# Altium PCB TECLADO-G5-5A.pcbDoc.PcbDoc (part 3 of 4)
Units mil, origin at the board's own origin, x right, y up, seen from the top; angles counter-clockwise.
Board outline 3514 x 3456 mil, 2 copper layers (Top Layer, Bottom Layer); 59 components, 33 nets, 154 pads, 25 vias.
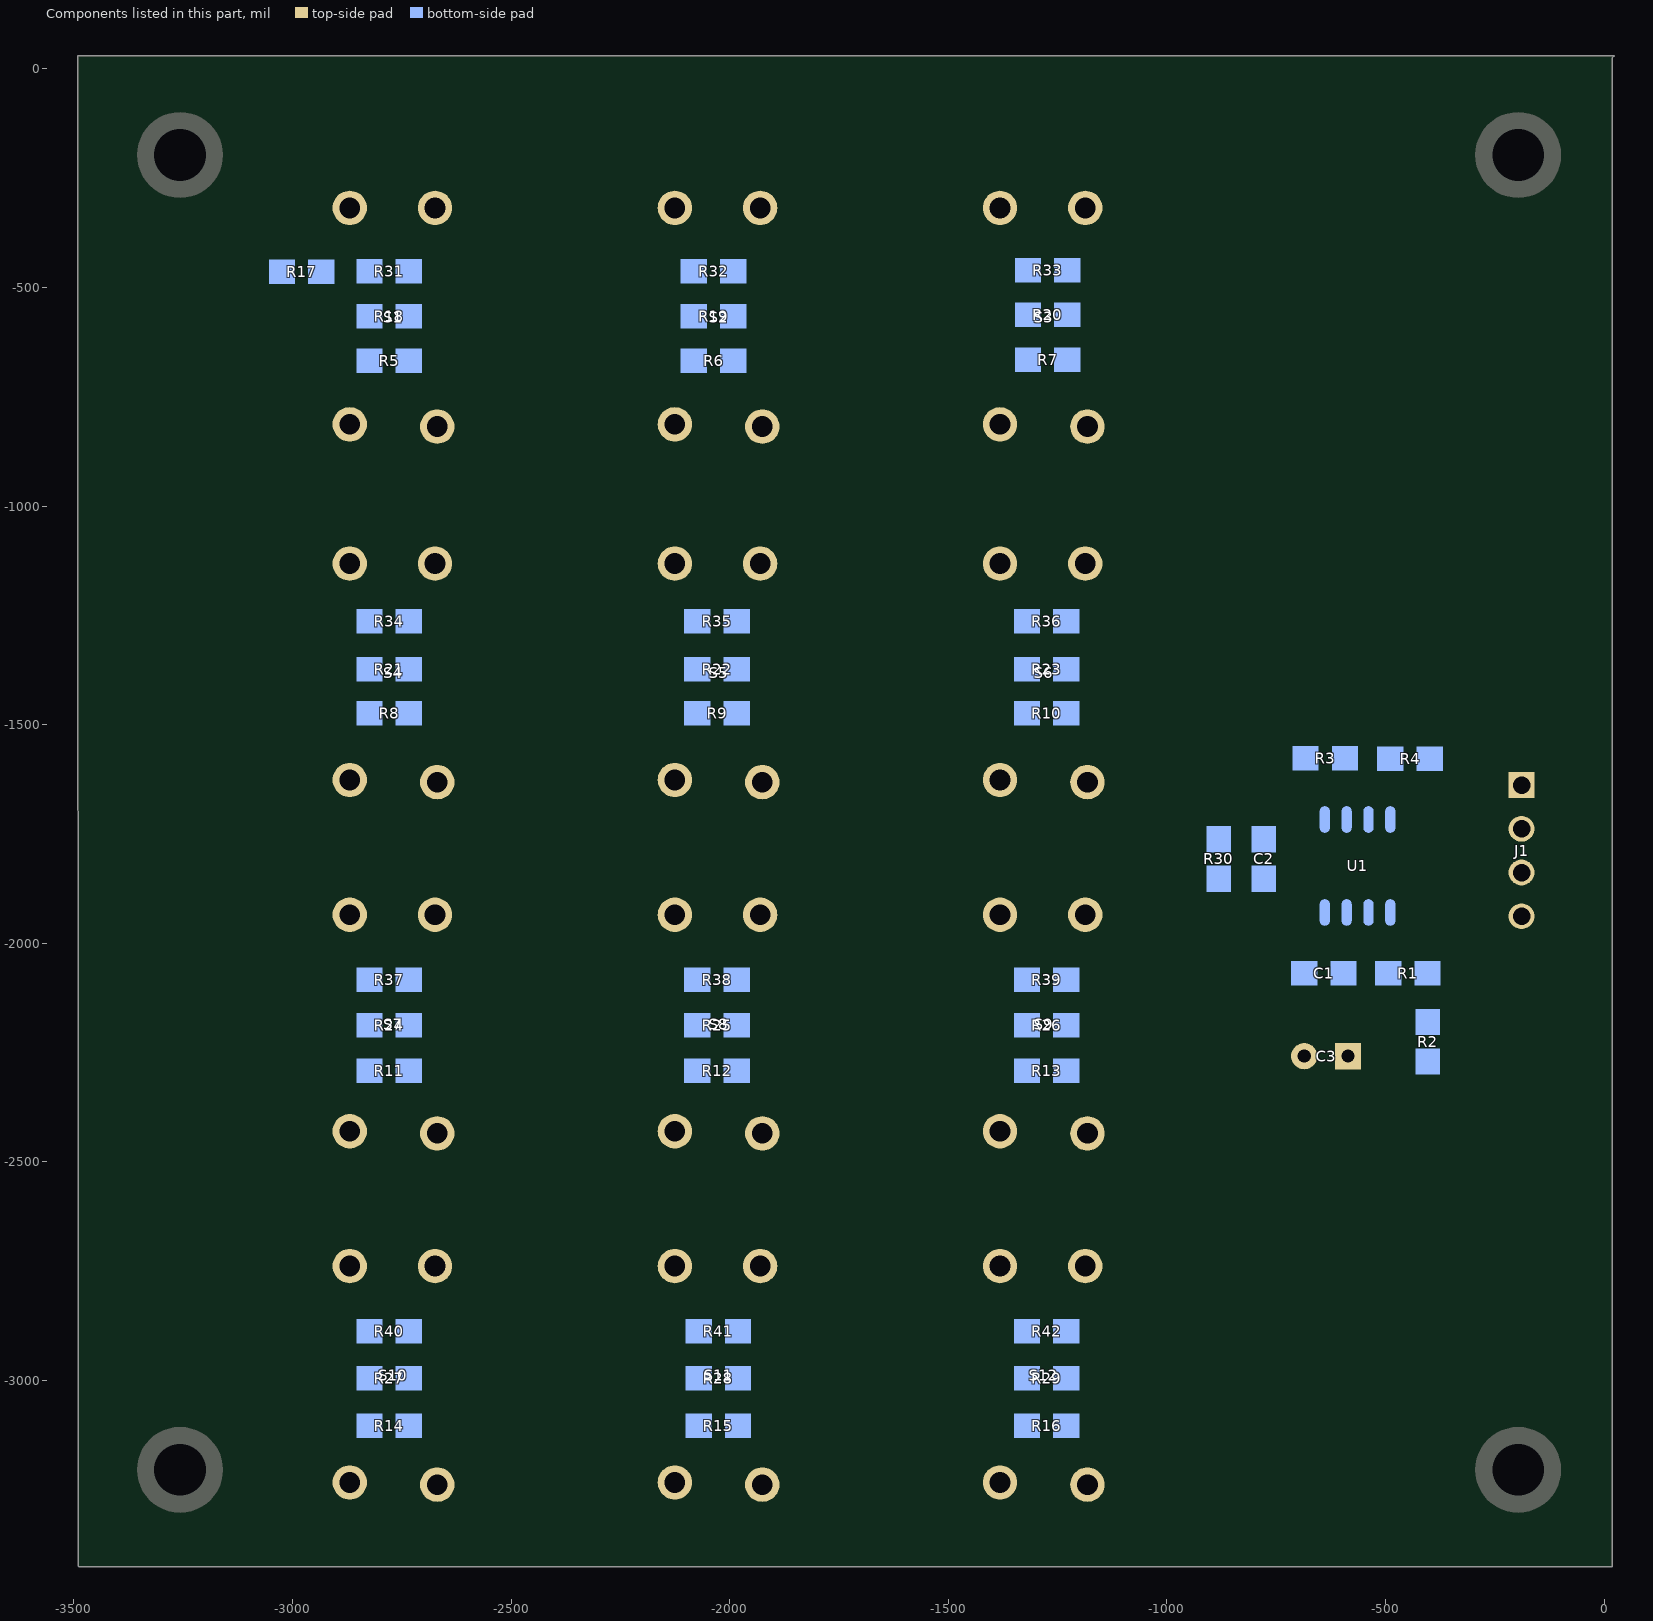
[diagram p3: the components of this part, seen from the top]

## Via types
v1: diameter 66.93, hole 39.37, Top Layer to Bottom Layer, 25 vias

## Nets (pads, with @x,y where several pads share a name; then routed paths per layer and width w, separated by ;. In a path a pad name is that pad's centre, name@x,y a point inside that pad or via, vN(x,y) a via of type N, cw(c..) or ccw(c..) an arc to the next point about the centre after c; other vN are vias at no path point) (continued)
copper on no net: (continued)
  Top Layer w1: -544,-928 -539,-928 ; -544,-927 -539,-927 ; -544,-926 -539,-926 ; -544,-912 -531,-912 ; -544,-827 -536,-827 ; -544,-511 -538,-511 ; -544,-510 -539,-510 ; -544,-480 -530,-480 ; -544,-479 -529,-479 ; -544,-430 -537,-430 ; -544,-429 -538,-429 ; -544,-339 -538,-339 ; -544,-338 -538,-338 ; -543,-925 -538,-925 ; -543,-924 -537,-924 ; -543,-923 -537,-923 ; -543,-859 -524,-859 ; -543,-826 -536,-826 ; -543,-825 -535,-825 ; -543,-618 -536,-618 ; -543,-512 -537,-512 ; -543,-464 -531,-464 ; -543,-431 -536,-431 ; -543,-418 -507,-418 ; -543,-346 -529,-346 ; -543,-340 -537,-340 ; -542,-1202 -518,-1202 ; -542,-922 -537,-922 ; -542,-921 -537,-921 ; -542,-913 -527,-913 ; -542,-824 -535,-824 ; -542,-673 -537,-673 ; -542,-619 -536,-619 ; -542,-513 -537,-513 ; -542,-457 -529,-457 ; -542,-455 -533,-455 ; -542,-432 -535,-432 ; -542,-345 -529,-345 ; -542,-341 -535,-341 ; -541,-920 -536,-920 ; -541,-919 -536,-919 ; -541,-918 -536,-918 ; -541,-823 -533,-823 ; -541,-515 -535,-515 ; -541,-514 -536,-514 ; -541,-481 -532,-481 ; -541,-456 -531,-456 ; -541,-433 -533,-433 ; -541,-342 -534,-342 ; -540,-1252 -494,-1252 ; -540,-1201 -517,-1201 ; -540,-917 -536,-917 ; -540,-916 -517,-916 ; -540,-915 -521,-915 ; -540,-914 -523,-914 ; -540,-860 -519,-860 ; -540,-822 -533,-822 ; -540,-821 -532,-821 ; -540,-620 -535,-620 ; -540,-614 -531,-614 ; -540,-517 -533,-517 ; -540,-516 -534,-516 ; -540,-434 -533,-434 ; -540,-344 -530,-344 ; -540,-343 -533,-343 ; -540,-334 -505,-334 ; -539,-999 -533,-999 ; -539,-820 -531,-820 ; -539,-621 -534,-621 ; -539,-518 -533,-518 ; -539,-473 -532,-473 ; -539,-472 -532,-472 ; -539,-471 -532,-471 ; -539,-470 -532,-470 ; -539,-435 -531,-435 ; -539,-419 -509,-419 ; -538,-1253 -487,-1253 ; -538,-1005 -506,-1005 ; -538,-998 -533,-998 ; -538,-997 -533,-997 ; -538,-613 -530,-613 ; -538,-519 -532,-519 ; -538,-489 -537,-489 ; -538,-469 -532,-469 ; -538,-463 -534,-463 ; -538,-436 -529,-436 ; -538,-420 -510,-420 ; -538,-415 -537,-415 ; -537,-1306 -528,-1306 ; -537,-996 -533,-996 ; -537,-995 -533,-995 ; -537,-994 -533,-994 ; -537,-993 -532,-993 ; -537,-992 -532,-992 ; -537,-819 -531,-819 ; -537,-818 -530,-818 ; -537,-668 -528,-668 ; -537,-623 -534,-623 ; -537,-622 -534,-622 ; -537,-612 -528,-612 ; -537,-520 -530,-520 ; -537,-474 -534,-474 ; -537,-468 -533,-468 ; -536,-991 -532,-991 ; -536,-990 -532,-990 ; -536,-989 -531,-989 ; -536,-988 -531,-988 ; -536,-987 -530,-987 ; -536,-817 -529,-817 ; -536,-667 -525,-667 ; -536,-624 -534,-624 ; -536,-521 -528,-521 ; -536,-486 -530,-486 ; -536,-475 -535,-475 ; -536,-437 -528,-437 ; -536,-335 -492,-335 ; -535,-1277 -498,-1277 ; -535,-1200 -512,-1200 ; -535,-986 -530,-986 ; -535,-985 -530,-985 ; -535,-984 -530,-984 ; -535,-816 -529,-816 ; -535,-815 -528,-815 ; -535,-611 -526,-611 ; -535,-522 -527,-522 ; -535,-438 -527,-438 ; -534,-983 -529,-983 ; -534,-982 -529,-982 ; -534,-981 -529,-981 ; -534,-861 -514,-861 ; -534,-523 -524,-523 ; -534,-485 -529,-485 ; -534,-466 -528,-466 ; -534,-439 -525,-439 ; -533,-980 -529,-980 ; -533,-979 -528,-979 ; -533,-978 -528,-978 ; -533,-977 -528,-977 ; -533,-976 -528,-976 ; -533,-814 -526,-814 ; -533,-813 -526,-813 ; -533,-666 -524,-666 ; -533,-610 -524,-610 ; -533,-609 -523,-609 ; -533,-524 -522,-524 ; -533,-484 -528,-484 ; -533,-467 -527,-467 ; -532,-1305 -528,-1305 ; -532,-1304 -527,-1304 ; -532,-1303 -527,-1303 ; -532,-1254 -460,-1254 ; -532,-975 -527,-975 ; -532,-974 -527,-974 ; -532,-973 -526,-973 ; -532,-972 -526,-972 ; -532,-971 -526,-971 ; -532,-812 -525,-812 ; -532,-803 -527,-803 ; -532,-802 -528,-802 ; -532,-801 -528,-801 ; -532,-800 -528,-800 ; -532,-799 -528,-799 ; -532,-798 -527,-798 ; -532,-797 -527,-797 ; -532,-796 -527,-796 ; -532,-795 -525,-795 ; -532,-665 -522,-665 ; -532,-478 -527,-478 ; -532,-440 -523,-440 ; -531,-1302 -526,-1302 ; -531,-1301 -526,-1301 ; -531,-1006 -486,-1006 ; -531,-970 -526,-970 ; -531,-811 -524,-811 ; -531,-804 -526,-804 ; -531,-794 -524,-794 ; -531,-664 -520,-664 ; -531,-608 -522,-608 ; -531,-525 -519,-525 ; -531,-483 -527,-483 ; -531,-477 -526,-477 ; -531,-421 -517,-421 ; -530,-1300 -524,-1300 ; -530,-1299 -524,-1299 ; -530,-1199 -508,-1199 ; -530,-969 -525,-969 ; -530,-968 -525,-968 ; -530,-967 -525,-967 ; -530,-966 -525,-966 ; -530,-917 -512,-917 ; -530,-810 -503,-810 ; -530,-807 -514,-807 ; -530,-806 -521,-806 ; -530,-805 -526,-805 ; -530,-793 -523,-793 ; -530,-482 -526,-482 ; -530,-476 -526,-476 ; -530,-468 -526,-468 ; -529,-1298 -522,-1298 ; -529,-1297 -520,-1297 ; -529,-965 -524,-965 ; -529,-964 -523,-964 ; -529,-963 -523,-963 ; -529,-962 -523,-962 ; -529,-961 -523,-961 ; -529,-862 -510,-862 ; -529,-809 -508,-809 ; -529,-808 -509,-808 ; -529,-792 -513,-792 ; -529,-663 -519,-663 ; -529,-607 -519,-607 ; -529,-526 -516,-526 ; -529,-481 -526,-481 ; -529,-475 -526,-475 ; -529,-474 -526,-474 ; -529,-473 -525,-473 ; -529,-470 -525,-470 ; -529,-469 -525,-469 ; -529,-441 -521,-441 ; -529,-336 -485,-336 ; -528,-1296 -508,-1296 ; -528,-1035 -517,-1035 ; -528,-1034 -515,-1034 ; -528,-960 -522,-960 ; -528,-959 -522,-959 ; -528,-958 -522,-958 ; -528,-957 -522,-957 ; -528,-662 -517,-662 ; -528,-606 -518,-606 ; -528,-480 -526,-480 ; -528,-472 -525,-472 ; -528,-471 -525,-471 ; -528,-400 -500,-400 ; -528,-399 -493,-399 ; -528,-398 -524,-398 ; -527,-1036 -523,-1036 ; -527,-956 -522,-956 ; -527,-605 -517,-605 ; -527,-527 -514,-527 ; -527,-479 -526,-479 ; -527,-401 -508,-401 ; -526,-1295 -509,-1295 ; -526,-1276 -492,-1276 ; -526,-1255 -460,-1255 ; -526,-1198 -504,-1198 ; -526,-955 -521,-955 ; -526,-954 -521,-954 ; -526,-953 -521,-953 ; -526,-952 -521,-952 ; -526,-951 -520,-951 ; -526,-918 -498,-918 ; -526,-791 -515,-791 ; -526,-661 -515,-661 ; -526,-402 -511,-402 ; -526,-337 -483,-337 ; -525,-1294 -510,-1294 ; -525,-1007 -486,-1007 ; -525,-950 -519,-950 ; -525,-949 -519,-949 ; -525,-948 -519,-948 ; -525,-947 -519,-947 ; -525,-790 -515,-790 ; -525,-604 -515,-604 ; -525,-403 -518,-403 ; -524,-946 -518,-946 ; -524,-863 -506,-863 ; -524,-789 -515,-789 ; -524,-660 -513,-660 ; -524,-528 -510,-528 ; -524,-404 -515,-404 ; -523,-1293 -512,-1293 ; -523,-1033 -511,-1033 ; -523,-1008 -487,-1008 ; -523,-945 -518,-945 ; -523,-944 -518,-944 ; -523,-943 -518,-943 ; -523,-942 -517,-942 ; -523,-919 -499,-919 ; -523,-864 -504,-864 ; -523,-859 -522,-859 ; -523,-659 -512,-659 ; -523,-603 -513,-603 ; -522,-1275 -490,-1275 ; -522,-941 -517,-941 ; -522,-940 -516,-940 ; -522,-939 -517,-939 ; -522,-788 -515,-788 ; -522,-602 -511,-602 ; -522,-405 -512,-405 ; -521,-1197 -501,-1197 ; -521,-938 -516,-938 ; -521,-937 -515,-937 ; -521,-936 -515,-936 ; -521,-935 -515,-935 ; -521,-920 -501,-920 ; -521,-787 -514,-787 ; -521,-658 -510,-658 ; -521,-529 -506,-529 ; -521,-406 -511,-406 ; -520,-1032 -507,-1032 ; -520,-934 -515,-934 ; -520,-933 -514,-933 ; -520,-601 -510,-601 ; -519,-1256 -460,-1256 ; -519,-1196 -499,-1196 ; -519,-932 -514,-932 ; -519,-931 -514,-931 ; -519,-930 -513,-930 ; -519,-811 -499,-811 ; -519,-794 -510,-794 ; -519,-793 -512,-793 ; -519,-786 -514,-786 ; -519,-785 -513,-785 ; -519,-657 -508,-657 ; -519,-600 -508,-600 ; -519,-530 -502,-530 ; -519,-436 -515,-436 ; -519,-435 -515,-435 ; -519,-434 -515,-434 ; -519,-433 -515,-433 ; -519,-432 -515,-432 ; -519,-431 -515,-431 ; -519,-430 -515,-430 ; -519,-429 -515,-429 ; -519,-428 -515,-428 ; -519,-427 -515,-427 ; -519,-407 -509,-407 ; -518,-929 -513,-929 ; -518,-928 -512,-928 ; -518,-927 -512,-927 ; -518,-865 -500,-865 ; -518,-795 -509,-795 ; -518,-784 -512,-784 ; -518,-783 -512,-783 ; -518,-483 -515,-483 ; -518,-482 -515,-482 ; -518,-481 -515,-481 ; -518,-480 -515,-480 ; -518,-479 -515,-479 ; -518,-478 -515,-478 ; -518,-477 -515,-477 ; -518,-476 -516,-476 ; -518,-439 -511,-439 ; -518,-438 -510,-438 ; -518,-437 -515,-437 ; -518,-426 -514,-426 ; -518,-425 -514,-425 ; -517,-1031 -504,-1031 ; -517,-926 -512,-926 ; -517,-925 -511,-925 ; -517,-782 -512,-782 ; -517,-656 -506,-656 ; -517,-599 -507,-599 ; -517,-531 -500,-531 ; -517,-489 -514,-489 ; -517,-487 -514,-487 ; -517,-486 -514,-486 ; -517,-485 -514,-485 ; -517,-484 -514,-484 ; -517,-441 -512,-441 ; -517,-440 -511,-440 ; -517,-424 -513,-424 ; -517,-408 -506,-408 ; -516,-1030 -503,-1030 ; -516,-924 -511,-924 ; -516,-923 -511,-923 ; -516,-921 -502,-921 ; -516,-796 -507,-796 ; -516,-781 -511,-781 ; -516,-780 -511,-780 ; -516,-655 -505,-655 ; -516,-491 -512,-491 ; -516,-490 -513,-490 ; -516,-488 -514,-488 ; -516,-443 -513,-443 ; -516,-442 -512,-442 ; -516,-423 -512,-423 ; -516,-422 -511,-422 ; -515,-1297 -507,-1297 ; -515,-1274 -485,-1274 ; -515,-1195 -494,-1195 ; -515,-922 -504,-922 ; -515,-797 -504,-797 ; -515,-779 -510,-779 ; -515,-778 -510,-778 ; -515,-777 -509,-777 ; -515,-654 -503,-654 ; -515,-598 -505,-598 ; -515,-493 -498,-493 ; -515,-492 -511,-492 ; -515,-421 -511,-421 ; -515,-416 -503,-416 ; -515,-409 -501,-409 ; -514,-1009 -490,-1009 ; -514,-866 -496,-866 ; -514,-812 -496,-812 ; -514,-798 -502,-798 ; -514,-776 -508,-776 ; -514,-775 -508,-775 ; -514,-532 -495,-532 ; -514,-398 -465,-398 ; -513,-1298 -506,-1298 ; -513,-1029 -501,-1029 ; -513,-813 -495,-813 ; -513,-774 -508,-774 ; -513,-773 -507,-773 ; -513,-653 -501,-653 ; -513,-597 -503,-597 ; -513,-494 -499,-494 ; -513,-437 -509,-437 ; -513,-436 -508,-436 ; -513,-415 -501,-415 ; -513,-410 -498,-410 ; -512,-1299 -505,-1299 ; -512,-799 -500,-799 ; -512,-772 -507,-772 ; -512,-771 -507,-771 ; -512,-435 -508,-435 ; -512,-338 -477,-338 ; -511,-1300 -480,-1300 ; -511,-1257 -462,-1257 ; -511,-1028 -498,-1028 ; -511,-800 -498,-800 ; -511,-770 -506,-770 ; -511,-769 -505,-769 ; -511,-768 -505,-768 ; -511,-652 -499,-652 ; -511,-596 -501,-596 ; -511,-587 -498,-587 ; -511,-586 -499,-586 ; -511,-585 -502,-585 ; -511,-584 -502,-584 ; -511,-495 -501,-495 ; -511,-434 -507,-434 ; -511,-433 -506,-433 ; -511,-432 -505,-432 ; -511,-411 -497,-411 ; -510,-1301 -483,-1301 ; -510,-1194 -491,-1194 ; -510,-767 -505,-767 ; -510,-766 -504,-766 ; -510,-651 -498,-651 ; -510,-595 -500,-595 ; -510,-593 -489,-593 ; -510,-592 -505,-592 ; -510,-591 -505,-591 ; -510,-590 -505,-590 ; -510,-589 -505,-589 ; -510,-588 -496,-588 ; -510,-533 -488,-533 ; -510,-431 -505,-431 ; -509,-1303 -493,-1303 ; -509,-1302 -488,-1302 ; -509,-867 -493,-867 ; -509,-814 -492,-814 ; -509,-765 -504,-765 ; -509,-764 -504,-764 ; -509,-650 -497,-650 ; -509,-594 -498,-594 ; -509,-583 -500,-583 ; -508,-1304 -496,-1304 ; -508,-1027 -496,-1027 ; -508,-801 -496,-801 ; -508,-763 -503,-763 ; -508,-762 -503,-762 ; -508,-761 -502,-761 ; -508,-430 -504,-430 ; -508,-429 -503,-429 ; -508,-428 -503,-428 ; -508,-414 -500,-414 ; -508,-397 -465,-397 ; -507,-1305 -505,-1305 ; -507,-1273 -480,-1273 ; -507,-1258 -462,-1258 ; -507,-760 -501,-760 ; -507,-759 -501,-759 ; -507,-758 -501,-758 ; -507,-649 -495,-649 ; -507,-582 -498,-582 ; -507,-427 -502,-427 ; -506,-1026 -493,-1026 ; -506,-757 -501,-757 ; -506,-581 -497,-581 ; -506,-496 -505,-496 ; -506,-426 -501,-426 ; -506,-412 -497,-412 ; -506,-401 -504,-401 ; -506,-396 -465,-396 ; -505,-1193 -487,-1193 ; -505,-1025 -492,-1025 ; -505,-868 -489,-868 ; -505,-815 -488,-815 ; -505,-756 -500,-756 ; -505,-755 -500,-755 ; -505,-754 -499,-754 ; -505,-648 -493,-648 ; -505,-534 -468,-534 ; -505,-425 -500,-425 ; -504,-917 -497,-917 ; -504,-802 -494,-802 ; -504,-753 -499,-753 ; -504,-752 -498,-752 ; -504,-751 -498,-751 ; -504,-592 -490,-592 ; -504,-580 -495,-580 ; -504,-424 -499,-424 ; -504,-423 -499,-423 ; -504,-413 -498,-413 ; -504,-408 -499,-408 ; -504,-376 -496,-376 ; -503,-1192 -485,-1192 ; -503,-916 -496,-916 ; -503,-869 -488,-869 ; -503,-750 -497,-750 ; -503,-749 -497,-749 ; -503,-748 -497,-748 ; -503,-647 -492,-647 ; -503,-589 -494,-589 ; -503,-447 -500,-447 ; -503,-446 -500,-446 ; -503,-445 -500,-445 ; -503,-444 -500,-444 ; -503,-443 -500,-443 ; -503,-442 -500,-442 ; -503,-441 -499,-441 ; -503,-440 -499,-440 ; -503,-439 -498,-439 ; -503,-438 -498,-438 ; -503,-422 -498,-422 ; -503,-407 -497,-407 ; -502,-1024 -490,-1024 ; -502,-816 -485,-816 ; -502,-803 -492,-803 ; -502,-747 -497,-747 ; -502,-646 -490,-646 ; -502,-591 -491,-591 ; -502,-579 -494,-579 ; -502,-449 -500,-449 ; -502,-448 -500,-448 ; -502,-437 -497,-437 ; -502,-421 -497,-421 ; -502,-406 -480,-406 ; -502,-377 -492,-377 ; -501,-915 -495,-915 ; -501,-804 -491,-804 ; -501,-746 -496,-746 ; -501,-745 -496,-745 ; -501,-744 -496,-744 ; -501,-645 -489,-645 ; -501,-590 -492,-590 ; -501,-535 -469,-535 ; -501,-514 -500,-514 ; -501,-513 -499,-513 ; -501,-512 -498,-512 ; -501,-492 -498,-492 ; -501,-487 -500,-487 ; -501,-486 -499,-486 ; -501,-485 -498,-485 ; -501,-436 -496,-436 ; -501,-435 -491,-435 ; -501,-420 -497,-420 ; -501,-419 -496,-419 ; -501,-405 -481,-405 ; -500,-1272 -475,-1272 ; -500,-1023 -488,-1023 ; -500,-870 -484,-870 ; -500,-743 -495,-743 ; -500,-742 -494,-742 ; -500,-741 -494,-741 ; -500,-578 -492,-578 ; -500,-511 -497,-511 ; -500,-484 -497,-484 ; -500,-483 -496,-483 ; -500,-434 -492,-434 ; -500,-418 -495,-418 ; -500,-404 -484,-404 ; -499,-1223 -494,-1223 ; -499,-914 -494,-914 ; -499,-817 -482,-817 ; -499,-740 -494,-740 ; -499,-739 -493,-739 ; -499,-577 -481,-577 ; -499,-510 -496,-510 ; -499,-509 -494,-509 ; -499,-482 -495,-482 ; -499,-433 -491,-433 ; -499,-395 -466,-395 ; -499,-378 -489,-378 ; -498,-1299 -477,-1299 ; -498,-1222 -489,-1222 ; -498,-913 -492,-913 ; -498,-818 -481,-818 ; -498,-805 -490,-805 ; -498,-738 -493,-738 ; -498,-737 -493,-737 ; -498,-736 -492,-736 ; -498,-644 -487,-644 ; -498,-576 -482,-576 ; -498,-536 -470,-536 ; -498,-432 -491,-432 ; -498,-417 -494,-417 ; -497,-1191 -481,-1191 ; -497,-1022 -486,-1022 ; -497,-912 -491,-912 ; -497,-735 -492,-735 ; -497,-734 -492,-734 ; -497,-733 -491,-733 ; -497,-643 -485,-643 ; -497,-508 -493,-508 ; -497,-481 -496,-481 ; -497,-431 -490,-431 ; -497,-416 -493,-416 ; -497,-379 -487,-379 ; -496,-1271 -472,-1271 ; -496,-1021 -485,-1021 ; -496,-911 -465,-911 ; -496,-732 -491,-732 ; -496,-731 -490,-731 ; -496,-730 -490,-730 ; -496,-594 -487,-594 ; -496,-575 -485,-575 ; -496,-507 -492,-507 ; -496,-415 -491,-415 ; -496,-403 -491,-403 ; -496,-339 -472,-339 ; -495,-1298 -475,-1298 ; -495,-1221 -485,-1221 ; -495,-910 -467,-910 ; -495,-871 -481,-871 ; -495,-806 -489,-806 ; -495,-729 -490,-729 ; -495,-642 -484,-642 ; -495,-574 -486,-574 ; -495,-506 -490,-506 ; -495,-430 -488,-430 ; -495,-414 -489,-414 ; -494,-1020 -483,-1020 ; -494,-1005 -485,-1005 ; -494,-909 -475,-909 ; -494,-819 -477,-819 ; -494,-728 -490,-728 ; -494,-727 -489,-727 ; -494,-726 -489,-726 ; -494,-725 -489,-725 ; -494,-641 -483,-641 ; -494,-595 -485,-595 ; -494,-436 -491,-436 ; -494,-429 -486,-429 ; -494,-413 -485,-413 ; -494,-380 -485,-380 ; -493,-1220 -483,-1220 ; -493,-908 -483,-908 ; -493,-807 -488,-807 ; -493,-724 -488,-724 ; -493,-723 -488,-723 ; -493,-722 -487,-722 ; -493,-721 -487,-721 ; -493,-640 -481,-640 ; -493,-573 -485,-573 ; -493,-505 -489,-505 ; -493,-440 -489,-440 ; -493,-439 -490,-439 ; -493,-438 -490,-438 ; -493,-437 -490,-437 ; -493,-428 -486,-428 ; -493,-412 -480,-412 ; -492,-1259 -481,-1259 ; -492,-1019 -482,-1019 ; -492,-872 -478,-872 ; -492,-808 -487,-808 ; -492,-720 -487,-720 ; -492,-719 -487,-719 ; -492,-718 -486,-718 ; -492,-596 -484,-596 ; -492,-572 -484,-572 ; -492,-537 -474,-537 ; -492,-504 -487,-504 ; -492,-451 -479,-451 ; -492,-441 -487,-441 ; -492,-381 -483,-381 ; -491,-1270 -464,-1270 ; -491,-1219 -481,-1219 ; -491,-1190 -477,-1190 ; -491,-907 -488,-907 ; -491,-820 -474,-820 ; -491,-717 -486,-717 ; -491,-716 -486,-716 ; -491,-597 -483,-597 ; -491,-571 -482,-571 ; -491,-503 -485,-503 ; -491,-452 -480,-452 ; -491,-450 -476,-450 ; -491,-442 -483,-442 ; -491,-427 -484,-427 ; -491,-394 -478,-394 ; -490,-1018 -480,-1018 ; -490,-1004 -485,-1004 ; -490,-906 -489,-906 ; -490,-809 -487,-809 ; -490,-715 -486,-715 ; -490,-714 -485,-714 ; -490,-713 -485,-713 ; -490,-712 -485,-712 ; -490,-639 -479,-639 ; -490,-598 -481,-598 ; -490,-502 -484,-502 ; -490,-443 -476,-443 ; -490,-426 -475,-426 ; -489,-1297 -472,-1297 ; -489,-1003 -484,-1003 ; -489,-1002 -484,-1002 ; -489,-873 -474,-873 ; -489,-711 -485,-711 ; -489,-710 -484,-710 ; -489,-709 -484,-709 ; -489,-708 -483,-708 ; -489,-707 -483,-707 ; -489,-638 -478,-638 ; -489,-599 -480,-599 ; -489,-570 -480,-570 ; -489,-411 -476,-411 ; -489,-382 -481,-382 ; -488,-1218 -478,-1218 ; -488,-1017 -478,-1017 ; -488,-1001 -483,-1001 ; -488,-821 -471,-821 ; -488,-706 -483,-706 ; -488,-637 -466,-637 ; -488,-600 -479,-600 ; -488,-569 -479,-569 ; -488,-501 -482,-501 ; -488,-444 -478,-444 ; -488,-425 -476,-425 ; -488,-410 -475,-410 ; -488,-383 -479,-383 ; -488,-340 -469,-340 ; -487,-1016 -477,-1016 ; -487,-1000 -483,-1000 ; -487,-999 -483,-999 ; -487,-998 -482,-998 ; -487,-997 -482,-997 ; -487,-874 -473,-874 ; -487,-705 -483,-705 ; -487,-704 -483,-704 ; -487,-703 -482,-703 ; -487,-702 -482,-702 ; -487,-701 -482,-701 ; -487,-601 -478,-601 ; -487,-578 -479,-578 ; -487,-568 -478,-568 ; -487,-424 -477,-424 ; -487,-407 -477,-407 ; -487,-384 -478,-384 ; -486,-1217 -475,-1217 ; -486,-996 -482,-996 ; -486,-995 -482,-995 ; -486,-994 -481,-994 ; -486,-993 -481,-993 ; -486,-992 -480,-992 ; -486,-822 -469,-822 ; -486,-700 -482,-700 ; -486,-699 -481,-699 ; -486,-698 -481,-698 ; -486,-697 -480,-697 ; -486,-696 -480,-696 ; -486,-636 -468,-636 ; -486,-602 -477,-602 ; -486,-500 -480,-500 ; -486,-445 -481,-445 ; -486,-436 -479,-436 ; -486,-435 -478,-435 ; -486,-434 -478,-434 ; -486,-433 -478,-433 ; -486,-432 -479,-432 ; -486,-423 -477,-423 ; -485,-1296 -470,-1296 ; -485,-1269 -463,-1269 ; -485,-1015 -476,-1015 ; -485,-991 -480,-991 ; -485,-990 -480,-990 ; -485,-989 -480,-989 ; -485,-988 -479,-988 ; -485,-695 -480,-695 ; -485,-694 -480,-694 ; -485,-693 -480,-693 ; -485,-692 -479,-692 ; -485,-691 -479,-691 ; -485,-690 -479,-690 ; -485,-635 -469,-635 ; -485,-603 -476,-603 ; -485,-579 -476,-579 ; -485,-567 -477,-567 ; -485,-499 -479,-499 ; -485,-437 -479,-437 ; -485,-385 -476,-385 ; -484,-1189 -475,-1189 ; -484,-987 -479,-987 ; -484,-986 -479,-986 ; -484,-912 -458,-912 ; -484,-823 -467,-823 ; -484,-689 -479,-689 ; -484,-566 -475,-566 ; -484,-498 -478,-498 ; -484,-431 -480,-431 ; -483,-1216 -472,-1216 ; -483,-1014 -474,-1014 ; -483,-985 -479,-985 ; -483,-984 -478,-984 ; -483,-983 -478,-983 ; -483,-982 -478,-982 ; -483,-875 -470,-875 ; -483,-688 -479,-688 ; -483,-687 -479,-687 ; -483,-686 -479,-686 ; -483,-685 -478,-685 ; -483,-684 -478,-684 ; -483,-683 -478,-683 ; -483,-634 -470,-634 ; -483,-604 -475,-604 ; -483,-565 -474,-565 ; -483,-422 -465,-422 ; -483,-409 -474,-409 ; -483,-386 -475,-386 ; -483,-341 -466,-341 ; -482,-1215 -470,-1215 ; -482,-1013 -473,-1013 ; -482,-981 -478,-981 ; -482,-980 -477,-980 ; -482,-979 -477,-979 ; -482,-978 -476,-978 ; -482,-977 -476,-977 ; -482,-682 -478,-682 ; -482,-681 -478,-681 ; -482,-680 -477,-680 ; -482,-679 -477,-679 ; -482,-678 -476,-678 ; -482,-677 -476,-677 ; -482,-605 -474,-605 ; -482,-580 -475,-580 ; -482,-497 -476,-497 ; -482,-442 -475,-442 ; -482,-408 -475,-408 ; -481,-1295 -469,-1295 ; -481,-1012 -472,-1012 ; -481,-976 -476,-976 ; -481,-824 -464,-824 ; -481,-676 -476,-676 ; -481,-633 -470,-633 ; -481,-581 -473,-581 ; -481,-564 -472,-564 ; -481,-421 -467,-421 ; -481,-387 -474,-387 ; -480,-1214 -468,-1214 ; -480,-975 -476,-975 ; -480,-974 -475,-974 ; -480,-973 -475,-973 ; -480,-972 -475,-972 ; -480,-971 -475,-971 ; -480,-876 -467,-876 ; -480,-675 -476,-675 ; -480,-674 -476,-674 ; -480,-673 -476,-673 ; -480,-672 -476,-672 ; -480,-671 -475,-671 ; -480,-670 -475,-670 ; -480,-669 -475,-669 ; -480,-632 -469,-632 ; -480,-606 -473,-606 ; -480,-582 -472,-582 ; -480,-563 -471,-563 ; -480,-496 -475,-496 ; -480,-449 -474,-449 ; -480,-388 -473,-388 ; -479,-1294 -469,-1294 ; -479,-1268 -463,-1268 ; -479,-1011 -471,-1011 ; -479,-970 -475,-970 ; -479,-969 -474,-969 ; -479,-968 -473,-968 ; -479,-967 -473,-967 ; -479,-913 -458,-913 ; -479,-668 -475,-668 ; -479,-667 -475,-667 ; -479,-666 -475,-666 ; -479,-665 -474,-665 ; -479,-664 -474,-664 ; -479,-663 -473,-663 ; -479,-607 -472,-607 ; -479,-562 -470,-562 ; -479,-399 -472,-399 ; -479,-389 -472,-389 ; -479,-342 -464,-342 ; -478,-966 -473,-966 ; -478,-965 -473,-965 ; -478,-964 -473,-964 ; -478,-963 -472,-963 ; -478,-962 -472,-962 ; -478,-825 -461,-825 ; -478,-662 -473,-662 ; -478,-661 -473,-661 ; -478,-660 -473,-660 ; -478,-659 -473,-659 ; -478,-658 -473,-658 ; -478,-657 -473,-657 ; -478,-656 -473,-656 ; -478,-631 -468,-631 ; -478,-608 -471,-608 ; -478,-583 -470,-583 ; -478,-561 -469,-561 ; -478,-495 -472,-495 ; -478,-441 -473,-441 ; -478,-427 -474,-427 ; -478,-400 -471,-400 ; -477,-1213 -466,-1213 ; -477,-1010 -470,-1010 ; -477,-961 -472,-961 ; -477,-877 -464,-877 ; -477,-655 -473,-655 ; -477,-654 -472,-654 ; -477,-609 -470,-609 ; -477,-494 -471,-494 ; -477,-448 -473,-448 ; -477,-401 -470,-401 ; -476,-1293 -468,-1293 ; -476,-1188 -475,-1188 ; -476,-1009 -469,-1009 ; -476,-1008 -469,-1008 ; -476,-960 -472,-960 ; -476,-959 -472,-959 ; -476,-958 -471,-958 ; -476,-957 -471,-957 ; -476,-956 -471,-956 ; -476,-653 -472,-653 ; -476,-652 -472,-652 ; -476,-651 -472,-651 ; -476,-650 -472,-650 ; -476,-649 -472,-649 ; -476,-648 -472,-648 ; -476,-647 -472,-647 ; -476,-646 -471,-646 ; -476,-630 -466,-630 ; -476,-611 -468,-611 ; -476,-610 -469,-610 ; -476,-584 -469,-584 ; -476,-560 -467,-560 ; -476,-493 -470,-493 ; -476,-447 -472,-447 ; -476,-440 -473,-440 ; -476,-429 -472,-429 ; -476,-428 -472,-428 ; -476,-420 -474,-420 ; -476,-402 -469,-402 ; -476,-390 -471,-390 ; -475,-1212 -463,-1212 ; -475,-1007 -469,-1007 ; -475,-1006 -469,-1006 ; -475,-1005 -468,-1005 ; -475,-955 -471,-955 ; -475,-954 -470,-954 ; -475,-953 -470,-953 ; -475,-952 -469,-952 ; -475,-951 -469,-951 ; -475,-878 -463,-878 ; -475,-826 -456,-826 ; -475,-645 -471,-645 ; -475,-644 -471,-644 ; -475,-643 -471,-643 ; -475,-642 -471,-642 ; -475,-641 -461,-641 ; -475,-640 -462,-640 ; -475,-639 -464,-639 ; -475,-638 -465,-638 ; -475,-629 -465,-629 ; -475,-612 -467,-612 ; -475,-585 -467,-585 ; -475,-559 -466,-559 ; -475,-533 -465,-533 ; -475,-446 -471,-446 ; -475,-439 -472,-439 ; -475,-438 -472,-438 ; -475,-437 -472,-437 ; -475,-431 -471,-431 ; -475,-430 -472,-430 ; -475,-403 -468,-403 ; -475,-391 -469,-391 ; -475,-343 -462,-343 ; -474,-1292 -468,-1292 ; -474,-1267 -463,-1267 ; -474,-1004 -468,-1004 ; -474,-950 -469,-950 ; -474,-628 -463,-628 ; -474,-613 -466,-613 ; -474,-586 -466,-586 ; -474,-558 -465,-558 ; -474,-492 -468,-492 ; -474,-436 -471,-436 ; -474,-433 -471,-433 ; -474,-432 -471,-432 ; -474,-404 -467,-404 ; -474,-392 -469,-392 ; -473,-1291 -468,-1291 ; -473,-1290 -468,-1290 ; -473,-1289 -467,-1289 ; -473,-1288 -467,-1288 ; -473,-1211 -462,-1211 ; -473,-1003 -468,-1003 ; -473,-1002 -468,-1002 ; -473,-1001 -467,-1001 ; -473,-949 -469,-949 ; -473,-948 -468,-948 ; -473,-947 -468,-947 ; -473,-946 -468,-946 ; -473,-945 -468,-945 ; -473,-914 -458,-914 ; -473,-827 -455,-827 ; -473,-614 -465,-614 ; -473,-587 -465,-587 ; -473,-557 -464,-557 ; -473,-445 -469,-445 ; -473,-435 -471,-435 ; -473,-434 -471,-434 ; -473,-393 -468,-393 ; -472,-1287 -466,-1287 ; -472,-1286 -466,-1286 ; -472,-1285 -466,-1285 ; -472,-1284 -466,-1284 ; -472,-1283 -465,-1283 ; -472,-1282 -465,-1282 ; -472,-1281 -465,-1281 ; -472,-1253 -460,-1253 ; -472,-1210 -460,-1210 ; -472,-1000 -467,-1000 ; -472,-999 -467,-999 ; -472,-998 -466,-998 ; -472,-997 -457,-997 ; -472,-944 -468,-944 ; -472,-943 -467,-943 ; -472,-942 -467,-942 ; -472,-941 -466,-941 ; -472,-879 -461,-879 ; -472,-627 -462,-627 ; -472,-615 -465,-615 ; -472,-532 -464,-532 ; -472,-491 -467,-491 ; -472,-444 -469,-444 ; -472,-406 -465,-406 ; -472,-405 -465,-405 ; -472,-394 -467,-394 ; -471,-1280 -465,-1280 ; -471,-1279 -465,-1279 ; -471,-1278 -465,-1278 ; -471,-1277 -464,-1277 ; -471,-1276 -464,-1276 ; -471,-1275 -464,-1275 ; -471,-1274 -464,-1274 ; -471,-1271 -464,-1271 ; -471,-1266 -463,-1266 ; -471,-996 -458,-996 ; -471,-995 -458,-995 ; -471,-994 -459,-994 ; -471,-940 -467,-940 ; -471,-939 -466,-939 ; -471,-938 -466,-938 ; -471,-937 -465,-937 ; -471,-915 -459,-915 ; -471,-616 -464,-616 ; -471,-588 -464,-588 ; -471,-556 -462,-556 ; -471,-490 -467,-490 ; -471,-443 -468,-443 ; -471,-442 -467,-442 ; -471,-441 -467,-441 ; -471,-407 -463,-407 ; -471,-344 -459,-344 ; -470,-1273 -464,-1273 ; -470,-1272 -464,-1272 ; -470,-993 -460,-993 ; -470,-936 -465,-936 ; -470,-935 -465,-935 ; -470,-828 -451,-828 ; -470,-626 -455,-626 ; -470,-555 -461,-555 ; -470,-531 -463,-531 ; -470,-489 -466,-489 ; -470,-408 -462,-408 ; -470,-399 -464,-399 ; -469,-1265 -463,-1265 ; -469,-1264 -462,-1264 ; -469,-1263 -462,-1263 ; -469,-1262 -462,-1262 ; -469,-1261 -462,-1261 ; -469,-1209 -458,-1209 ; -469,-992 -461,-992 ; -469,-991 -462,-991 ; -469,-990 -462,-990 ; -469,-934 -465,-934 ; -469,-933 -464,-933 ; -469,-932 -464,-932 ; -469,-931 -464,-931 ; -469,-880 -458,-880 ; -469,-642 -460,-642 ; -469,-625 -456,-625 ; -469,-617 -462,-617 ; -469,-589 -462,-589 ; -469,-554 -460,-554 ; -469,-530 -462,-530 ; -469,-488 -465,-488 ; -469,-487 -465,-487 ; -469,-440 -467,-440 ; -469,-439 -467,-439 ; -469,-438 -466,-438 ; -469,-409 -460,-409 ; -468,-1260 -462,-1260 ; -468,-1259 -462,-1259 ; -468,-1252 -459,-1252 ; -468,-989 -462,-989 ; -468,-988 -462,-988 ; -468,-987 -462,-987 ; -468,-930 -464,-930 ; -468,-929 -463,-929 ; -468,-928 -463,-928 ; -468,-927 -462,-927 ; -468,-643 -459,-643 ; -468,-624 -457,-624 ; -468,-619 -460,-619 ; -468,-618 -461,-618 ; -468,-590 -461,-590 ; -468,-486 -464,-486 ; -468,-437 -465,-437 ; -468,-436 -465,-436 ; -468,-435 -465,-435 ; -468,-434 -465,-434 ; -468,-433 -465,-433 ; -468,-432 -465,-432 ; -468,-423 -465,-423 ; -468,-410 -458,-410 ; -468,-345 -457,-345 ; -467,-1208 -451,-1208 ; -467,-986 -461,-986 ; -467,-985 -461,-985 ; -467,-984 -460,-984 ; -467,-926 -462,-926 ; -467,-925 -462,-925 ; -467,-924 -462,-924 ; -467,-829 -447,-829 ; -467,-644 -457,-644 ; -467,-620 -460,-620 ; -467,-591 -460,-591 ; -467,-553 -459,-553 ; -467,-529 -460,-529 ; -467,-485 -464,-485 ; -467,-411 -457,-411 ; -466,-983 -460,-983 ; -466,-923 -461,-923 ; -466,-922 -461,-922 ; -466,-881 -456,-881 ; -466,-623 -457,-623 ; -466,-622 -458,-622 ; -466,-621 -459,-621 ; -466,-592 -459,-592 ; -466,-552 -458,-552 ; -466,-484 -464,-484 ; -466,-483 -463,-483 ; -466,-400 -464,-400 ; -466,-346 -455,-346 ; -465,-1251 -459,-1251 ; -465,-1250 -458,-1250 ; -465,-1207 -451,-1207 ; -465,-998 -456,-998 ; -465,-982 -460,-982 ; -465,-981 -459,-981 ; -465,-980 -459,-980 ; -465,-979 -458,-979 ; -465,-921 -461,-921 ; -465,-920 -461,-920 ; -465,-919 -460,-919 ; -465,-918 -460,-918 ; -465,-916 -459,-916 ; -465,-645 -456,-645 ; -465,-593 -458,-593 ; -465,-551 -457,-551 ; -465,-528 -459,-528 ; -465,-482 -462,-482 ; -465,-481 -462,-481 ; -465,-412 -455,-412 ; -464,-1249 -458,-1249 ; -464,-1248 -458,-1248 ; -464,-1247 -458,-1247 ; -464,-1246 -458,-1246 ; -464,-1245 -458,-1245 ; -464,-1244 -458,-1244 ; -464,-978 -458,-978 ; -464,-977 -458,-977 ; -464,-976 -457,-976 ; -464,-917 -460,-917 ; -464,-882 -453,-882 ; -464,-594 -457,-594 ; -464,-550 -456,-550 ; -464,-527 -457,-527 ; -464,-480 -462,-480 ; -464,-347 -454,-347 ; -463,-1243 -457,-1243 ; -463,-1242 -457,-1242 ; -463,-1241 -457,-1241 ; -463,-1206 -451,-1206 ; -463,-999 -455,-999 ; -463,-975 -457,-975 ; -463,-911 -458,-911 ; -463,-830 -442,-830 ; -463,-646 -455,-646 ; -463,-595 -456,-595 ; -463,-549 -455,-549 ; -463,-526 -456,-526 ; -463,-413 -451,-413 ; -462,-1240 -457,-1240 ; -462,-1239 -457,-1239 ; -462,-1238 -457,-1238 ; -462,-1237 -456,-1237 ; -462,-1236 -456,-1236 ; -462,-1235 -455,-1235 ; -462,-1205 -450,-1205 ; -462,-1000 -455,-1000 ; -462,-974 -457,-974 ; -462,-973 -456,-973 ; -462,-972 -455,-972 ; -462,-910 -457,-910 ; -462,-909 -457,-909 ; -462,-883 -452,-883 ; -462,-647 -453,-647 ; -462,-596 -455,-596 ; -462,-548 -453,-548 ; -462,-525 -455,-525 ; -461,-1234 -455,-1234 ; -461,-1233 -455,-1233 ; -461,-1232 -455,-1232 ; -461,-1231 -455,-1231 ; -461,-1230 -455,-1230 ; -461,-1229 -455,-1229 ; -461,-1228 -454,-1228 ; -461,-1002 -454,-1002 ; -461,-1001 -454,-1001 ; -461,-971 -455,-971 ; -461,-970 -455,-970 ; -461,-969 -454,-969 ; -461,-908 -457,-908 ; -461,-907 -456,-907 ; -461,-906 -456,-906 ; -461,-648 -451,-648 ; -461,-627 -454,-627 ; -461,-597 -454,-597 ; -461,-547 -452,-547 ; -461,-524 -454,-524 ; -461,-414 -447,-414 ; -461,-348 -452,-348 ; -460,-1227 -454,-1227 ; -460,-1226 -454,-1226 ; -460,-1225 -454,-1225 ; -460,-1224 -454,-1224 ; -460,-1223 -454,-1223 ; -460,-1222 -454,-1222 ; -460,-1221 -453,-1221 ; -460,-1204 -449,-1204 ; -460,-1051 -453,-1051 ; -460,-1050 -453,-1050 ; -460,-1049 -453,-1049 ; -460,-1048 -453,-1048 ; -460,-1047 -453,-1047 ; -460,-1046 -453,-1046 ; -460,-1045 -453,-1045 ; -460,-1044 -453,-1044 ; -460,-1043 -453,-1043 ; -460,-1042 -453,-1042 ; -460,-1041 -453,-1041 ; -460,-1040 -453,-1040 ; -460,-1039 -453,-1039 ; -460,-1038 -453,-1038 ; -460,-1037 -453,-1037 ; -460,-1036 -453,-1036 ; -460,-1035 -453,-1035 ; -460,-1034 -453,-1034 ; -460,-1033 -453,-1033 ; -460,-1032 -454,-1032 ; -460,-1031 -454,-1031 ; -460,-1030 -454,-1030 ; -460,-1029 -454,-1029 ; -460,-1028 -454,-1028 ; -460,-1027 -454,-1027 ; -460,-1026 -454,-1026 ; -460,-1025 -454,-1025 ; -460,-1024 -454,-1024 ; -460,-1023 -454,-1023 ; -460,-1022 -454,-1022 ; -460,-1021 -454,-1021 ; -460,-1020 -454,-1020 ; -460,-1019 -454,-1019 ; -460,-1018 -454,-1018 ; -460,-1017 -454,-1017 ; -460,-1016 -454,-1016 ; -460,-1015 -454,-1015 ; -460,-1014 -454,-1014 ; -460,-1013 -454,-1013 ; -460,-1012 -454,-1012 ; -460,-1011 -454,-1011 ; -460,-1010 -454,-1010 ; -460,-1009 -454,-1009 ; -460,-1008 -454,-1008 ; -460,-1007 -454,-1007 ; -460,-1006 -454,-1006 ; -460,-1005 -454,-1005 ; -460,-1004 -454,-1004 ; -460,-1003 -454,-1003 ; -460,-968 -454,-968 ; -460,-967 -453,-967 ; -460,-966 -453,-966 ; -460,-905 -455,-905 ; -460,-904 -455,-904 ; -460,-903 -455,-903 ; -460,-902 -454,-902 ; -460,-884 -451,-884 ; -460,-831 -437,-831 ; -460,-629 -453,-629 ; -460,-628 -454,-628 ; -460,-598 -453,-598 ; -460,-523 -453,-523 ; -460,-415 -445,-415 ; -459,-1220 -453,-1220 ; -459,-1219 -453,-1219 ; -459,-1056 -451,-1056 ; -459,-1055 -452,-1055 ; -459,-1054 -452,-1054 ; -459,-1053 -452,-1053 ; -459,-1052 -453,-1052 ; -459,-965 -453,-965 ; -459,-901 -454,-901 ; -459,-649 -450,-649 ; -459,-630 -453,-630 ; -459,-546 -450,-546 ; -459,-522 -452,-522 ; -459,-349 -450,-349 ; -458,-1218 -453,-1218 ; -458,-1217 -453,-1217 ; -458,-1216 -453,-1216 ; -458,-1215 -453,-1215 ; -458,-1214 -453,-1214 ; -458,-1213 -452,-1213 ; -458,-1203 -447,-1203 ; -458,-1074 -450,-1074 ; -458,-1073 -450,-1073 ; -458,-1072 -450,-1072 ; -458,-1071 -451,-1071 ; -458,-1070 -451,-1070 ; -458,-1069 -451,-1069 ; -458,-1068 -451,-1068 ; -458,-1067 -451,-1067 ; -458,-1066 -451,-1066 ; -458,-1065 -451,-1065 ; -458,-1064 -451,-1064 ; -458,-1063 -451,-1063 ; -458,-1062 -451,-1062 ; -458,-1061 -451,-1061 ; -458,-1060 -451,-1060 ; -458,-1059 -451,-1059 ; -458,-1058 -451,-1058 ; -458,-1057 -451,-1057 ; -458,-964 -452,-964 ; -458,-963 -451,-963 ; -458,-962 -451,-962 ; -458,-900 -454,-900 ; -458,-899 -454,-899 ; -458,-898 -453,-898 ; -458,-897 -453,-897 ; -458,-832 -435,-832 ; -458,-631 -451,-631 ; -458,-599 -451,-599 ; -458,-545 -449,-545 ; -458,-521 -451,-521 ; -458,-416 -435,-416 ; -458,-350 -449,-350 ; -457,-1212 -452,-1212 ; -457,-1211 -451,-1211 ; -457,-1210 -451,-1210 ; -457,-1209 -451,-1209 ; -457,-1090 -448,-1090 ; -457,-1089 -449,-1089 ; -457,-1088 -449,-1088 ; -457,-1087 -449,-1087 ; -457,-1086 -449,-1086 ; -457,-1085 -450,-1085 ; -457,-1084 -450,-1084 ; -457,-1083 -450,-1083 ; -457,-1082 -450,-1082 ; -457,-1081 -450,-1081 ; -457,-1080 -450,-1080 ; -457,-1079 -450,-1079 ; -457,-1078 -450,-1078 ; -457,-1077 -450,-1077 ; -457,-1076 -450,-1076 ; -457,-1075 -450,-1075 ; -457,-961 -451,-961 ; -457,-960 -451,-960 ; -457,-959 -450,-959 ; -457,-896 -453,-896 ; -457,-895 -452,-895 ; -457,-894 -452,-894 ; -457,-893 -451,-893 ; -457,-885 -450,-885 ; -457,-650 -437,-650 ; -457,-634 -450,-634 ; -457,-633 -451,-633 ; -457,-632 -451,-632 ; -457,-600 -451,-600 ; -457,-544 -448,-544 ; -457,-520 -450,-520 ; -456,-1202 -446,-1202 ; -456,-1093 -448,-1093 ; -456,-1092 -448,-1092 ; -456,-1091 -448,-1091 ; -456,-958 -450,-958 ; -456,-892 -451,-892 ; -456,-651 -438,-651 ; -456,-601 -450,-601 ; -456,-543 -447,-543 ; -456,-351 -448,-351 ; -455,-1201 -445,-1201 ; -455,-1104 -447,-1104 ; -455,-1103 -447,-1103 ; -455,-1102 -447,-1102 ; -455,-1101 -448,-1101 ; -455,-1100 -448,-1100 ; -455,-1099 -448,-1099 ; -455,-1098 -448,-1098 ; -455,-1097 -448,-1097 ; -455,-1096 -448,-1096 ; -455,-1095 -448,-1095 ; -455,-1094 -448,-1094 ; -455,-957 -450,-957 ; -455,-956 -449,-956 ; -455,-955 -448,-955 ; -455,-891 -451,-891 ; -455,-890 -451,-890 ; -455,-889 -450,-889 ; -455,-886 -450,-886 ; -455,-636 -449,-636 ; -455,-635 -449,-635 ; -455,-602 -448,-602 ; -455,-519 -444,-519 ; -455,-518 -444,-518 ; -455,-417 -435,-417 ; -455,-352 -447,-352 ; -454,-1115 -446,-1115 ; -454,-1114 -447,-1114 ; -454,-1113 -447,-1113 ; -454,-1112 -447,-1112 ; -454,-1111 -447,-1111 ; -454,-1110 -447,-1110 ; -454,-1109 -447,-1109 ; -454,-1108 -447,-1108 ; -454,-1107 -447,-1107 ; -454,-1106 -447,-1106 ; -454,-1105 -447,-1105 ; -454,-954 -448,-954 ; -454,-953 -448,-953 ; -454,-952 -447,-952 ; -454,-951 -447,-951 ; -454,-888 -450,-888 ; -454,-887 -450,-887 ; -454,-833 -429,-833 ; -454,-652 -440,-652 ; -454,-638 -448,-638 ; -454,-637 -448,-637 ; -454,-603 -447,-603 ; -454,-542 -446,-542 ; -454,-517 -444,-517 ; -453,-1200 -444,-1200 ; -453,-1124 -446,-1124 ; -453,-1123 -446,-1123 ; -453,-1122 -446,-1122 ; -453,-1121 -446,-1121 ; -453,-1120 -446,-1120 ; -453,-1119 -446,-1119 ; -453,-1118 -446,-1118 ; -453,-1117 -446,-1117 ; -453,-1116 -446,-1116 ; -453,-950 -446,-950 ; -453,-949 -445,-949 ; -453,-640 -447,-640 ; -453,-639 -447,-639 ; -453,-604 -446,-604 ; -453,-541 -445,-541 ; -453,-516 -445,-516 ; -453,-515 -445,-515 ; -453,-353 -446,-353 ; -452,-1128 -445,-1128 ; -452,-1127 -445,-1127 ; -452,-1126 -445,-1126 ; -452,-1125 -446,-1125 ; -452,-948 -445,-948 ; -452,-653 -441,-653 ; -452,-641 -446,-641 ; -452,-605 -446,-605 ; -452,-540 -444,-540 ; -452,-354 -445,-354 ; -451,-1199 -442,-1199 ; -451,-1138 -444,-1138 ; -451,-1137 -444,-1137 ; -451,-1136 -444,-1136 ; -451,-1135 -444,-1135 ; -451,-1134 -444,-1134 ; -451,-1133 -444,-1133 ; -451,-1132 -444,-1132 ; -451,-1131 -444,-1131 ; -451,-1130 -444,-1130 ; -451,-1129 -444,-1129 ; -451,-947 -437,-947 ; -451,-946 -438,-946 ; -451,-945 -439,-945 ; -451,-643 -446,-643 ; -451,-642 -446,-642 ; -451,-607 -444,-607 ; -451,-606 -445,-606 ; -451,-539 -443,-539 ; -451,-514 -445,-514 ; -451,-418 -435,-418 ; -451,-355 -444,-355 ; -450,-1198 -441,-1198 ; -450,-1147 -443,-1147 ; -450,-1146 -443,-1146 ; -450,-1145 -443,-1145 ; -450,-1144 -443,-1144 ; -450,-1143 -443,-1143 ; -450,-1142 -443,-1142 ; -450,-1141 -443,-1141 ; -450,-1140 -443,-1140 ; -450,-1139 -443,-1139 ; -450,-944 -439,-944 ; -450,-943 -440,-943 ; -450,-942 -440,-942 ; -450,-834 -422,-834 ; -450,-646 -444,-646 ; -450,-645 -444,-645 ; -450,-644 -444,-644 ; -450,-608 -443,-608 ; -450,-538 -441,-538 ; -450,-513 -444,-513 ; -450,-512 -443,-512 ; -450,-356 -442,-356 ; -449,-1151 -442,-1151 ; -449,-1150 -442,-1150 ; -449,-1149 -442,-1149 ; -449,-1148 -443,-1148 ; -449,-941 -439,-941 ; -449,-940 -439,-940 ; -449,-654 -443,-654 ; -449,-647 -444,-647 ; -449,-609 -442,-609 ; -449,-537 -440,-537 ; -449,-511 -442,-511 ; -448,-1197 -440,-1197 ; -448,-1157 -441,-1157 ; -448,-1156 -441,-1156 ; -448,-1155 -442,-1155 ; -448,-1154 -442,-1154 ; -448,-1153 -442,-1153 ; -448,-1152 -442,-1152 ; -448,-939 -437,-939 ; -448,-938 -437,-938 ; -448,-806 -383,-806 ; -448,-805 -441,-805 ; -448,-649 -436,-649 ; -448,-648 -435,-648 ; -448,-610 -441,-610 ; -448,-536 -439,-536 ; -448,-522 -443,-522 ; -448,-521 -443,-521 ; -448,-520 -443,-520 ; -448,-510 -441,-510 ; -448,-357 -441,-357 ; -447,-1196 -439,-1196 ; -447,-1164 -440,-1164 ; -447,-1163 -440,-1163 ; -447,-1162 -440,-1162 ; -447,-1161 -441,-1161 ; -447,-1160 -441,-1160 ; -447,-1159 -441,-1159 ; -447,-1158 -441,-1158 ; -447,-937 -436,-937 ; -447,-936 -436,-936 ; -447,-935 -435,-935 ; -447,-611 -440,-611 ; -447,-535 -438,-535 ; -447,-527 -441,-527 ; -447,-526 -442,-526 ; -447,-525 -442,-525 ; -447,-524 -442,-524 ; -447,-523 -443,-523 ; -447,-509 -440,-509 ; -447,-358 -440,-358 ; -446,-1195 -438,-1195 ; -446,-1171 -439,-1171 ; -446,-1170 -439,-1170 ; -446,-1169 -440,-1169 ; -446,-1168 -440,-1168 ; -446,-1167 -440,-1167 ; -446,-1166 -440,-1166 ; -446,-1165 -440,-1165 ; -446,-934 -434,-934 ; -446,-933 -433,-933 ; -446,-932 -432,-932 ; -446,-612 -439,-612 ; -446,-534 -437,-534 ; -446,-533 -436,-533 ; -446,-532 -435,-532 ; -446,-531 -434,-531 ; -446,-530 -432,-530 ; -446,-529 -441,-529 ; -446,-528 -441,-528 ; -446,-508 -439,-508 ; -446,-359 -439,-359 ; -445,-1173 -439,-1173 ; -445,-1172 -439,-1172 ; -445,-931 -439,-931 ; -445,-835 -409,-835 ; -445,-613 -439,-613 ; -445,-507 -438,-507 ; -445,-360 -438,-360 ; -444,-1194 -437,-1194 ; -444,-1180 -438,-1180 ; -444,-1179 -438,-1179 ; -444,-1178 -438,-1178 ; -444,-1177 -439,-1177 ; -444,-1176 -439,-1176 ; -444,-1175 -439,-1175 ; -444,-1174 -439,-1174 ; -444,-930 -439,-930 ; -444,-929 -438,-929 ; -444,-928 -437,-928 ; -444,-807 -390,-807 ; -444,-614 -438,-614 ; -444,-506 -438,-506 ; -444,-505 -437,-505 ; -444,-361 -437,-361 ; -443,-1193 -436,-1193 ; -443,-1186 -437,-1186 ; -443,-1185 -437,-1185 ; -443,-1184 -437,-1184 ; -443,-1183 -437,-1183 ; -443,-1182 -437,-1182 ; -443,-1181 -437,-1181 ; -443,-948 -437,-948 ; -443,-927 -437,-927 ; -443,-926 -437,-926 ; -443,-925 -436,-925 ; -443,-836 -351,-836 ; -443,-616 -436,-616 ; -443,-615 -437,-615 ; -443,-504 -436,-504 ; -443,-362 -436,-362 ; -442,-1192 -436,-1192 ; -442,-1191 -436,-1191 ; -442,-1189 -436,-1189 ; -442,-1188 -436,-1188 ; -442,-1187 -437,-1187 ; -442,-950 -435,-950 ; -442,-949 -436,-949 ; -442,-924 -436,-924 ; -442,-923 -436,-923 ; -442,-647 -433,-647 ; -442,-617 -436,-617 ; -442,-503 -435,-503 ; -442,-415 -435,-415 ; -442,-363 -435,-363 ; -441,-1190 -436,-1190 ; -441,-922 -435,-922 ; -441,-921 -435,-921 ; -441,-646 -432,-646 ; -441,-618 -435,-618 ; -441,-502 -434,-502 ; -441,-364 -435,-364 ; -440,-953 -433,-953 ; -440,-952 -434,-952 ; -440,-951 -434,-951 ; -440,-920 -435,-920 ; -440,-919 -434,-919 ; -440,-918 -433,-918 ; -440,-645 -431,-645 ; -440,-620 -433,-620 ; -440,-619 -434,-619 ; -440,-501 -433,-501 ; -440,-500 -432,-500 ; -440,-365 -434,-365 ; -439,-954 -432,-954 ; -439,-917 -433,-917 ; -439,-916 -433,-916 ; -439,-915 -432,-915 ; -439,-644 -430,-644 ; -439,-621 -433,-621 ; -439,-529 -431,-529 ; -439,-499 -432,-499 ; -439,-423 -436,-423 ; -439,-422 -436,-422 ; -439,-421 -436,-421 ; -439,-420 -436,-420 ; -439,-419 -436,-419 ; -439,-367 -432,-367 ; -439,-366 -433,-366 ; -438,-955 -432,-955 ; -438,-914 -432,-914 ; -438,-837 -360,-837 ; -438,-808 -401,-808 ; -438,-622 -432,-622 ; -438,-528 -430,-528 ; -438,-498 -431,-498 ; -438,-424 -436,-424 ; -438,-414 -434,-414 ; -438,-368 -432,-368 ; -437,-957 -430,-957 ; -437,-956 -431,-956 ; -437,-931 -432,-931 ; -437,-930 -431,-930 ; -437,-913 -432,-913 ; -437,-912 -432,-912 ; -437,-911 -431,-911 ; -437,-643 -428,-643 ; -437,-624 -431,-624 ; -437,-623 -432,-623 ; -437,-527 -429,-527 ; -437,-497 -430,-497 ; -437,-413 -433,-413 ; -437,-412 -433,-412 ; -437,-411 -433,-411 ; -437,-410 -433,-410 ; -437,-409 -432,-409 ; -437,-369 -431,-369 ; -436,-959 -429,-959 ; -436,-958 -430,-958 ; -436,-929 -430,-929 ; -436,-928 -429,-928 ; -436,-910 -430,-910 ; -436,-909 -430,-909 ; -436,-642 -427,-642 ; -436,-626 -430,-626 ; -436,-625 -430,-625 ; -436,-496 -429,-496 ; -436,-408 -432,-408 ; -436,-407 -432,-407 ; -436,-406 -431,-406 ; -436,-370 -430,-370 ; -435,-960 -429,-960 ; -435,-927 -428,-927 ; -435,-908 -430,-908 ; -435,-907 -430,-907 ; -435,-906 -429,-906 ; -435,-809 -403,-809 ; -435,-641 -426,-641 ; -435,-627 -429,-627 ; -435,-526 -427,-526 ; -435,-495 -428,-495 ; -435,-405 -430,-405 ; -435,-404 -430,-404 ; -435,-403 -429,-403 ; -435,-372 -429,-372 ; -435,-371 -429,-371 ; -434,-962 -428,-962 ; -434,-961 -428,-961 ; -434,-926 -428,-926 ; -434,-905 -429,-905 ; -434,-628 -429,-628 ; -434,-525 -426,-525 ; -434,-494 -427,-494 ; -434,-493 -426,-493 ; -434,-402 -429,-402 ; -434,-373 -428,-373 ; -433,-964 -426,-964 ; -433,-963 -427,-963 ; -433,-925 -426,-925 ; -433,-924 -426,-924 ; -433,-904 -429,-904 ; -433,-903 -429,-903 ; -433,-902 -428,-902 ; -433,-901 -428,-901 ; -433,-640 -425,-640 ; -433,-630 -428,-630 ; -433,-629 -428,-629 ; -433,-524 -425,-524 ; -433,-492 -425,-492 ; -433,-401 -428,-401 ; -433,-400 -428,-400 ; -433,-374 -428,-374 ; -432,-966 -425,-966 ; -432,-965 -425,-965 ; -432,-923 -425,-923 ; -432,-900 -428,-900 ; -432,-899 -427,-899 ; -432,-838 -365,-838 ; -432,-639 -423,-639 ; -432,-633 -426,-633 ; -432,-632 -427,-632 ; -432,-631 -428,-631 ; -432,-523 -424,-523 ; -432,-491 -424,-491 ; -432,-399 -427,-399 ; -432,-398 -426,-398 ; -432,-376 -426,-376 ; -432,-375 -427,-375 ; -431,-967 -424,-967 ; -431,-922 -424,-922 ; -431,-898 -426,-898 ; -431,-897 -426,-897 ; -431,-638 -421,-638 ; -431,-634 -417,-634 ; -431,-522 -423,-522 ; -431,-490 -424,-490 ; -431,-397 -426,-397 ; -431,-377 -426,-377 ; -430,-969 -423,-969 ; -430,-968 -423,-968 ; -430,-921 -423,-921 ; -430,-896 -426,-896 ; -430,-895 -426,-895 ; -430,-637 -420,-637 ; -430,-636 -419,-636 ; -430,-635 -418,-635 ; -430,-521 -421,-521 ; -430,-489 -423,-489 ; -430,-488 -422,-488 ; -430,-396 -425,-396 ; -430,-395 -410,-395 ; -430,-379 -425,-379 ; -430,-378 -425,-378 ; -429,-971 -422,-971 ; -429,-970 -423,-970 ; -429,-920 -423,-920 ; -429,-894 -426,-894 ; -429,-893 -425,-893 ; -429,-892 -425,-892 ; -429,-487 -421,-487 ; -429,-394 -411,-394 ; -429,-381 -424,-381 ; -429,-380 -425,-380 ; -428,-973 -421,-973 ; -428,-972 -421,-972 ; -428,-919 -421,-919 ; -428,-918 -421,-918 ; -428,-891 -425,-891 ; -428,-890 -425,-890 ; -428,-889 -425,-889 ; -428,-520 -420,-520 ; -428,-486 -421,-486 ; -428,-418 -414,-418 ; -428,-417 -417,-417 ; -428,-416 -423,-416 ; -428,-393 -415,-393 ; -428,-384 -423,-384 ; -428,-383 -423,-383 ; -428,-382 -423,-382 ; -427,-974 -420,-974 ; -427,-917 -420,-917 ; -427,-888 -425,-888 ; -427,-519 -419,-519 ; -427,-485 -414,-485 ; -427,-415 -423,-415 ; -426,-976 -419,-976 ; -426,-975 -419,-975 ; -426,-916 -419,-916 ; -426,-915 -419,-915 ; -426,-839 -368,-839 ; -426,-484 -414,-484 ; -426,-414 -422,-414 ; -426,-413 -422,-413 ; -426,-412 -422,-412 ; -426,-411 -421,-411 ; -426,-387 -421,-387 ; -426,-386 -422,-386 ; -426,-385 -422,-385 ; -425,-978 -418,-978 ; -425,-977 -418,-977 ; -425,-914 -417,-914 ; -425,-633 -415,-633 ; -425,-518 -417,-518 ; -425,-483 -415,-483 ; -425,-410 -421,-410 ; -425,-409 -420,-409 ; -425,-408 -419,-408 ; -425,-392 -418,-392 ; -425,-390 -420,-390 ; -425,-389 -421,-389 ; -425,-388 -421,-388 ; -424,-979 -417,-979 ; -424,-913 -416,-913 ; -424,-517 -416,-517 ; -424,-482 -416,-482 ; -424,-481 -416,-481 ; -424,-419 -413,-419 ; -424,-407 -419,-407 ; -424,-391 -420,-391 ; -423,-981 -416,-981 ; -423,-980 -416,-980 ; -423,-912 -415,-912 ; -423,-911 -415,-911 ; -423,-632 -414,-632 ; -423,-516 -415,-516 ; -423,-480 -417,-480 ; -423,-406 -418,-406 ; -423,-405 -418,-405 ; -422,-983 -415,-983 ; -422,-982 -415,-982 ; -422,-631 -413,-631 ; -422,-515 -414,-515 ; -422,-479 -416,-479 ; -422,-451 -413,-451 ; -422,-450 -414,-450 ; -422,-420 -412,-420 ; -422,-404 -417,-404 ; -422,-403 -416,-403 ; -421,-985 -414,-985 ; -421,-984 -414,-984 ; -421,-910 -414,-910 ; -421,-909 -413,-909 ; -421,-630 -412,-630 ; -421,-478 -415,-478 ; -421,-477 -415,-477 ; -421,-476 -415,-476 ; -421,-434 -418,-434 ; -421,-433 -417,-433 ; -421,-402 -415,-402 ; -420,-986 -413,-986 ; -420,-908 -412,-908 ; -420,-629 -411,-629 ; -420,-514 -412,-514 ; -420,-475 -415,-475 ; -420,-449 -407,-449 ; -420,-432 -416,-432 ; -420,-401 -414,-401 ; -419,-988 -412,-988 ; -419,-987 -412,-987 ; -419,-907 -411,-907 ; -419,-906 -411,-906 ; -419,-628 -410,-628 ; -419,-513 -410,-513 ; -419,-486 -413,-486 ; -419,-474 -414,-474 ; -419,-473 -414,-473 ; -419,-472 -414,-472 ; -419,-471 -414,-471 ; -419,-470 -414,-470 ; -419,-431 -416,-431 ; -419,-430 -415,-430 ; -419,-429 -415,-429 ; -419,-400 -413,-400 ; -419,-399 -412,-399 ; -418,-990 -411,-990 ; -418,-989 -411,-989 ; -418,-805 -375,-805 ; -418,-627 -408,-627 ; -418,-487 -412,-487 ; -418,-469 -414,-469 ; -418,-468 -413,-468 ; -418,-467 -413,-467 ; -418,-466 -412,-466 ; -418,-465 -412,-465 ; -418,-464 -412,-464 ; -418,-463 -412,-463 ; -418,-462 -412,-462 ; -418,-461 -412,-461 ; -418,-460 -412,-460 ; -418,-459 -412,-459 ; -418,-458 -412,-458 ; -418,-457 -412,-457 ; -418,-456 -412,-456 ; -418,-455 -412,-455 ; -418,-454 -412,-454 ; -418,-453 -412,-453 ; -418,-428 -414,-428 ; -418,-427 -414,-427 ; -418,-426 -414,-426 ; -418,-425 -414,-425 ; -418,-421 -412,-421 ; -418,-398 -407,-398 ; -417,-992 -410,-992 ; -417,-991 -410,-991 ; -417,-905 -410,-905 ; -417,-840 -381,-840 ; -417,-512 -409,-512 ; -417,-489 -398,-489 ; -417,-488 -397,-488 ; -417,-452 -413,-452 ; -417,-448 -407,-448 ; -417,-424 -413,-424 ; -417,-423 -413,-423 ; -417,-422 -412,-422 ; -417,-397 -407,-397 ; -417,-396 -408,-396 ; -416,-993 -409,-993 ; -416,-904 -409,-904 ; -416,-903 -408,-903 ; -416,-626 -407,-626 ; -416,-490 -400,-490 ; -416,-447 -408,-447 ; -415,-996 -407,-996 ; -415,-995 -408,-995 ; -415,-994 -408,-994 ; -415,-902 -407,-902 ; -415,-625 -406,-625 ; -415,-511 -407,-511 ; -415,-492 -408,-492 ; -415,-491 -402,-491 ; -415,-446 -408,-446 ; -414,-997 -407,-997 ; -414,-901 -406,-901 ; -414,-624 -404,-624 ; -414,-510 -404,-510 ; -414,-493 -408,-493 ; -413,-998 -406,-998 ; -413,-900 -405,-900 ; -413,-841 -386,-841 ; -413,-623 -402,-623 ; -413,-495 -407,-495 ; -413,-494 -408,-494 ; -413,-445 -408,-445 ; -412,-1001 -404,-1001 ; -412,-1000 -405,-1000 ; -412,-999 -406,-999 ; -412,-899 -404,-899 ; -412,-622 -397,-622 ; -412,-496 -406,-496 ; -411,-1003 -403,-1003 ; -411,-1002 -404,-1002 ; -411,-898 -404,-898 ; -411,-897 -403,-897 ; -411,-509 -371,-509 ; -411,-497 -405,-497 ; -411,-451 -404,-451 ; -411,-450 -405,-450 ; -411,-444 -406,-444 ; -411,-400 -406,-400 ; -411,-399 -407,-399 ; -410,-1005 -402,-1005 ; -410,-1004 -403,-1004 ; -410,-896 -402,-896 ; -410,-621 -393,-621 ; -410,-508 -374,-508 ; -410,-500 -403,-500 ; -410,-499 -404,-499 ; -410,-498 -404,-498 ; -410,-452 -404,-452 ; -410,-443 -405,-443 ; -410,-402 -405,-402 ; -410,-401 -405,-401 ; -409,-1006 -402,-1006 ; -409,-895 -401,-895 ; -409,-620 -389,-620 ; -409,-453 -403,-453 ; -409,-442 -404,-442 ; -409,-403 -404,-403 ; -408,-1008 -400,-1008 ; -408,-1007 -401,-1007 ; -408,-894 -400,-894 ; -408,-619 -387,-619 ; -408,-507 -376,-507 ; -408,-502 -401,-502 ; -408,-501 -402,-501 ; -408,-454 -402,-454 ; -408,-441 -403,-441 ; -408,-406 -403,-406 ; -408,-405 -403,-405 ; -408,-404 -404,-404 ; -407,-1011 -399,-1011 ; -407,-1010 -400,-1010 ; -407,-1009 -400,-1009 ; -407,-893 -399,-893 ; -407,-618 -386,-618 ; -407,-503 -400,-503 ; -407,-479 -390,-479 ; -407,-478 -387,-478 ; -407,-477 -385,-477 ; -407,-455 -401,-455 ; -407,-440 -402,-440 ; -407,-439 -402,-439 ; -407,-410 -401,-410 ; -407,-409 -402,-409 ; -407,-408 -403,-408 ; -407,-407 -403,-407 ; -406,-1012 -398,-1012 ; -406,-892 -399,-892 ; -406,-504 -399,-504 ; -406,-480 -392,-480 ; -406,-456 -400,-456 ; -406,-438 -401,-438 ; -406,-411 -401,-411 ; -405,-1013 -398,-1013 ; -405,-891 -398,-891 ; -405,-890 -397,-890 ; -405,-617 -383,-617 ; -405,-506 -381,-506 ; -405,-505 -389,-505 ; -405,-481 -399,-481 ; -405,-457 -399,-457 ; -405,-437 -401,-437 ; -405,-436 -400,-436 ; -405,-415 -400,-415 ; -405,-414 -400,-414 ; -405,-413 -400,-413 ; -405,-412 -401,-412 ; -404,-1015 -397,-1015 ; -404,-1014 -397,-1014 ; -404,-889 -396,-889 ; -404,-616 -395,-616 ; -404,-487 -396,-487 ; -404,-482 -398,-482 ; -404,-459 -397,-459 ; -404,-458 -398,-458 ; -404,-435 -400,-435 ; -404,-434 -399,-434 ; -404,-420 -398,-420 ; -404,-419 -399,-419 ; -404,-418 -399,-418 ; -404,-417 -400,-417 ; -404,-416 -400,-416 ; -403,-1018 -396,-1018 ; -403,-1017 -396,-1017 ; -403,-1016 -396,-1016 ; -403,-888 -395,-888 ; -403,-615 -394,-615 ; -403,-483 -396,-483 ; -403,-460 -396,-460 ; -403,-433 -398,-433 ; -403,-432 -398,-432 ; -403,-431 -398,-431 ; -403,-430 -398,-430 ; -403,-429 -398,-429 ; -403,-428 -398,-428 ; -403,-427 -398,-427 ; -403,-426 -398,-426 ; -403,-425 -398,-425 ; -403,-424 -399,-424 ; -403,-423 -398,-423 ; -403,-422 -398,-422 ; -403,-421 -398,-421 ; -402,-1019 -395,-1019 ; -402,-887 -394,-887 ; -402,-804 -369,-804